# Altium PCB PCB1.PcbDoc (part 1 of 3)
Units mil, origin at the board's own origin, x right, y up, seen from the top; angles counter-clockwise.
Board outline 2780 x 2325 mil, 2 copper layers (Top Layer, Bottom Layer); 78 components, 66 nets, 284 pads, 83 vias.
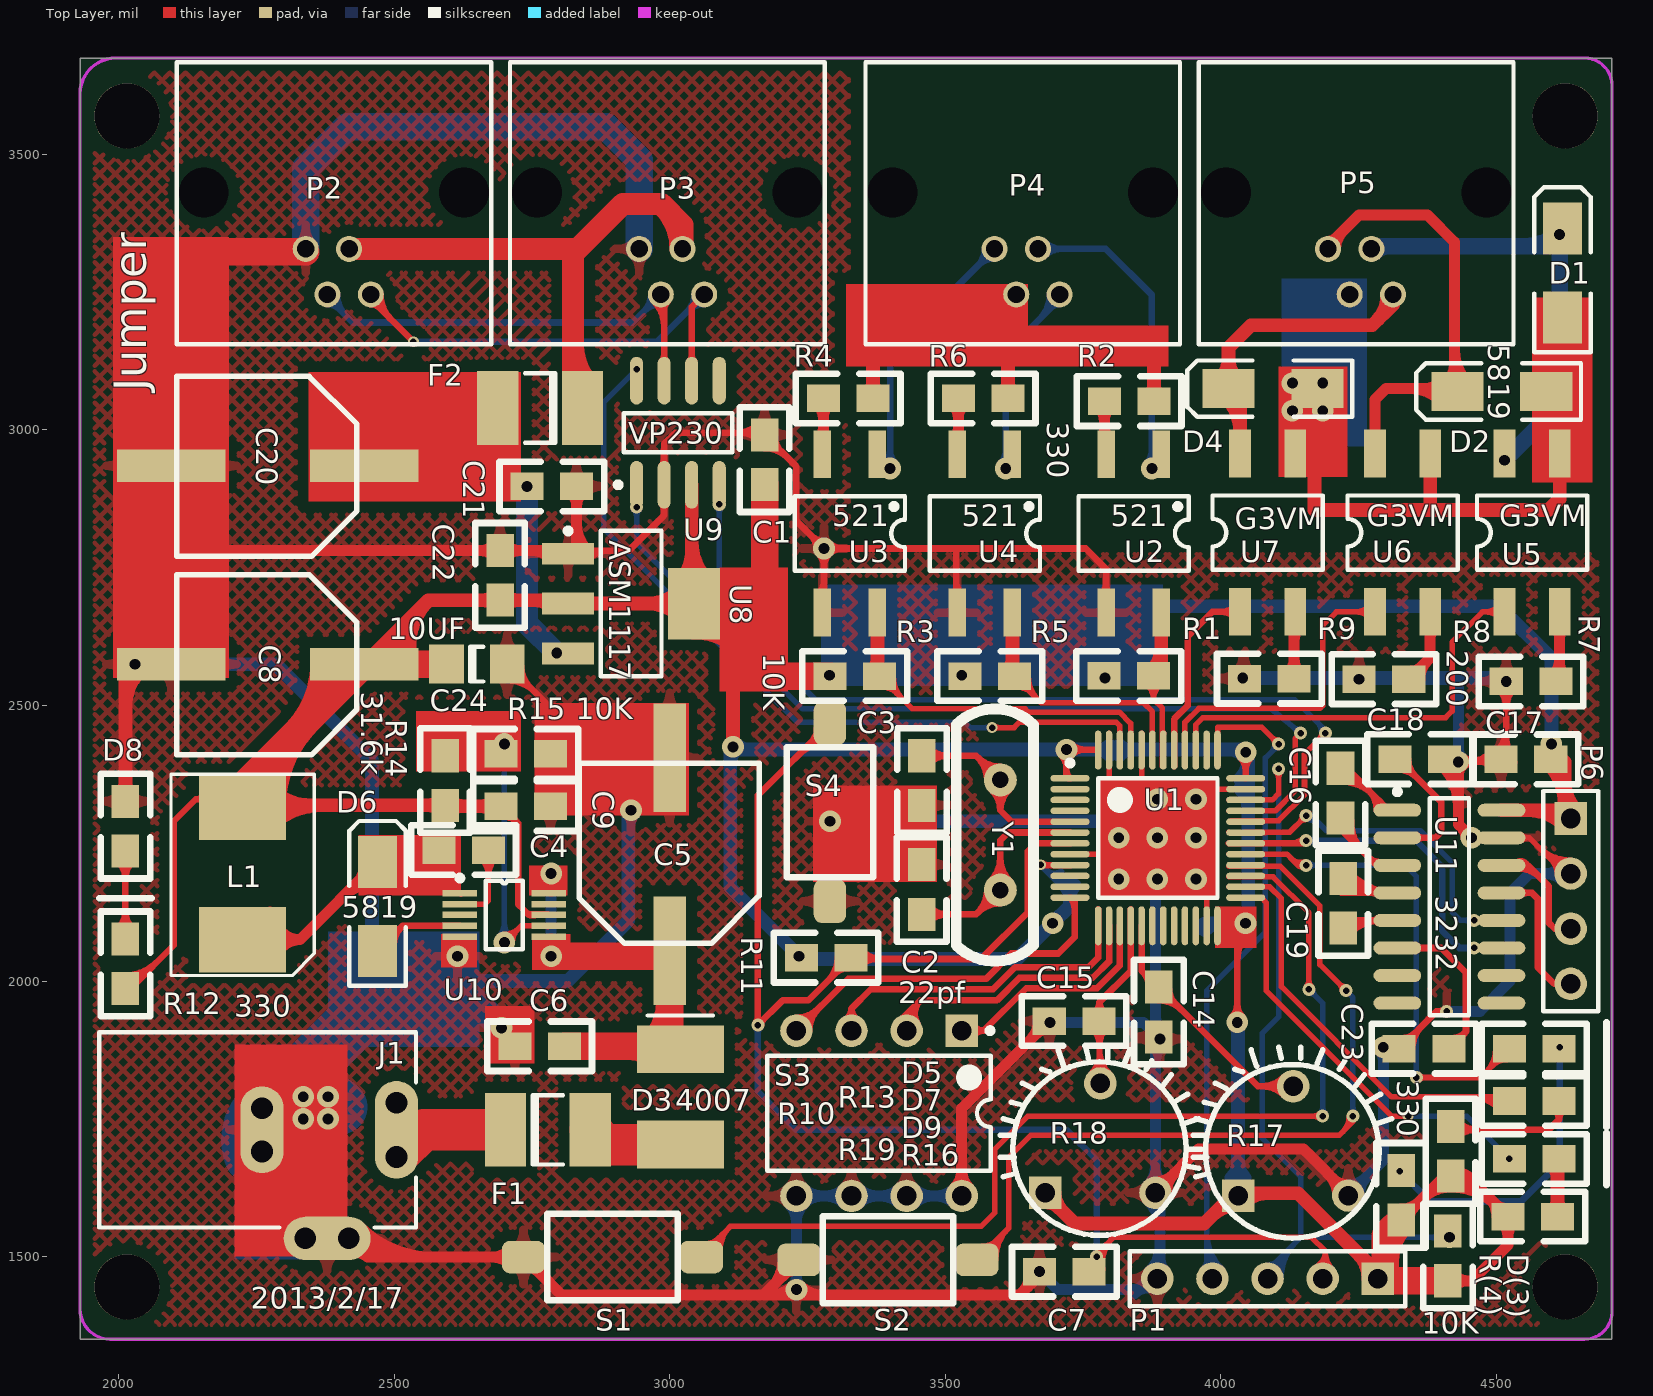
[diagram p0: Top Layer view]
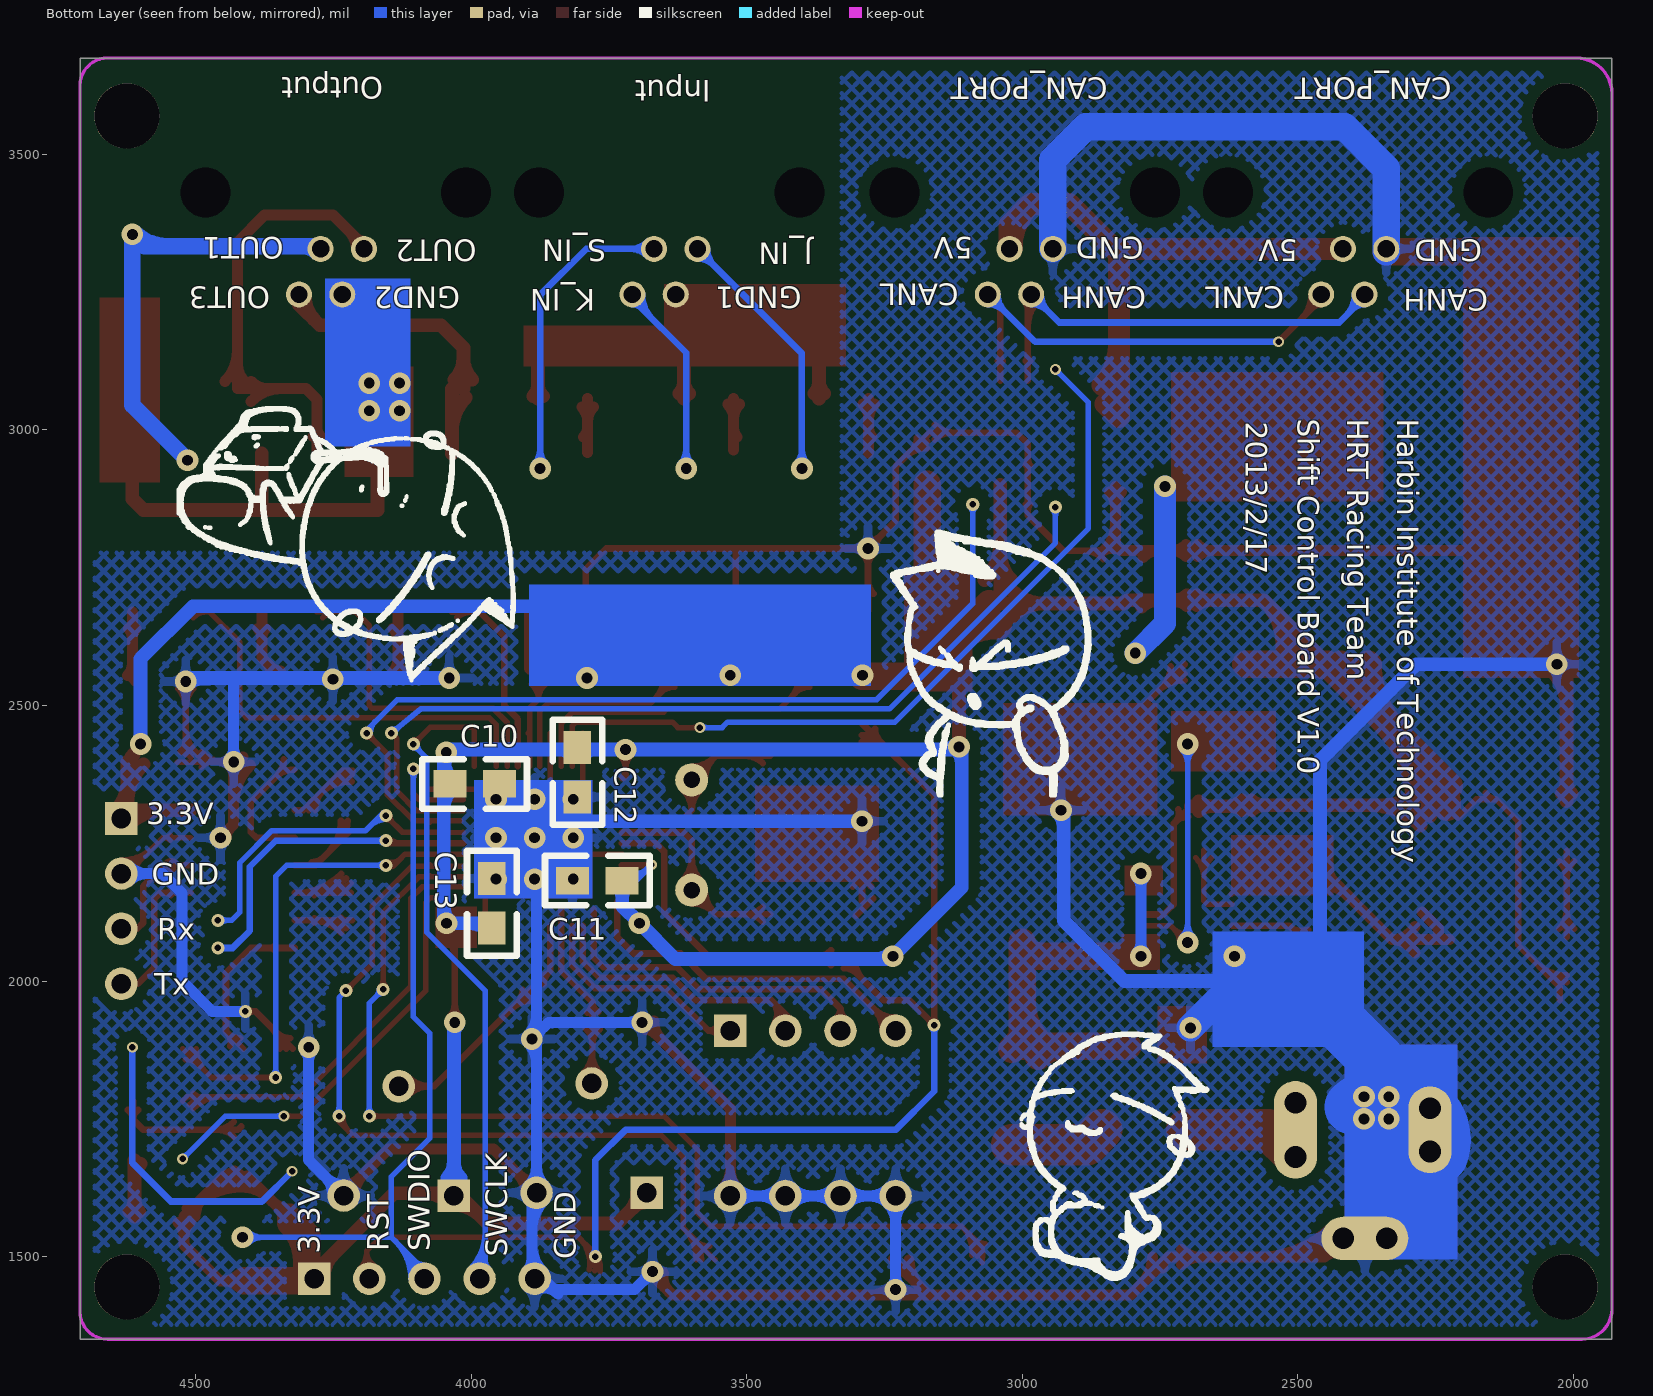
[diagram p1: Bottom Layer view, seen from below]
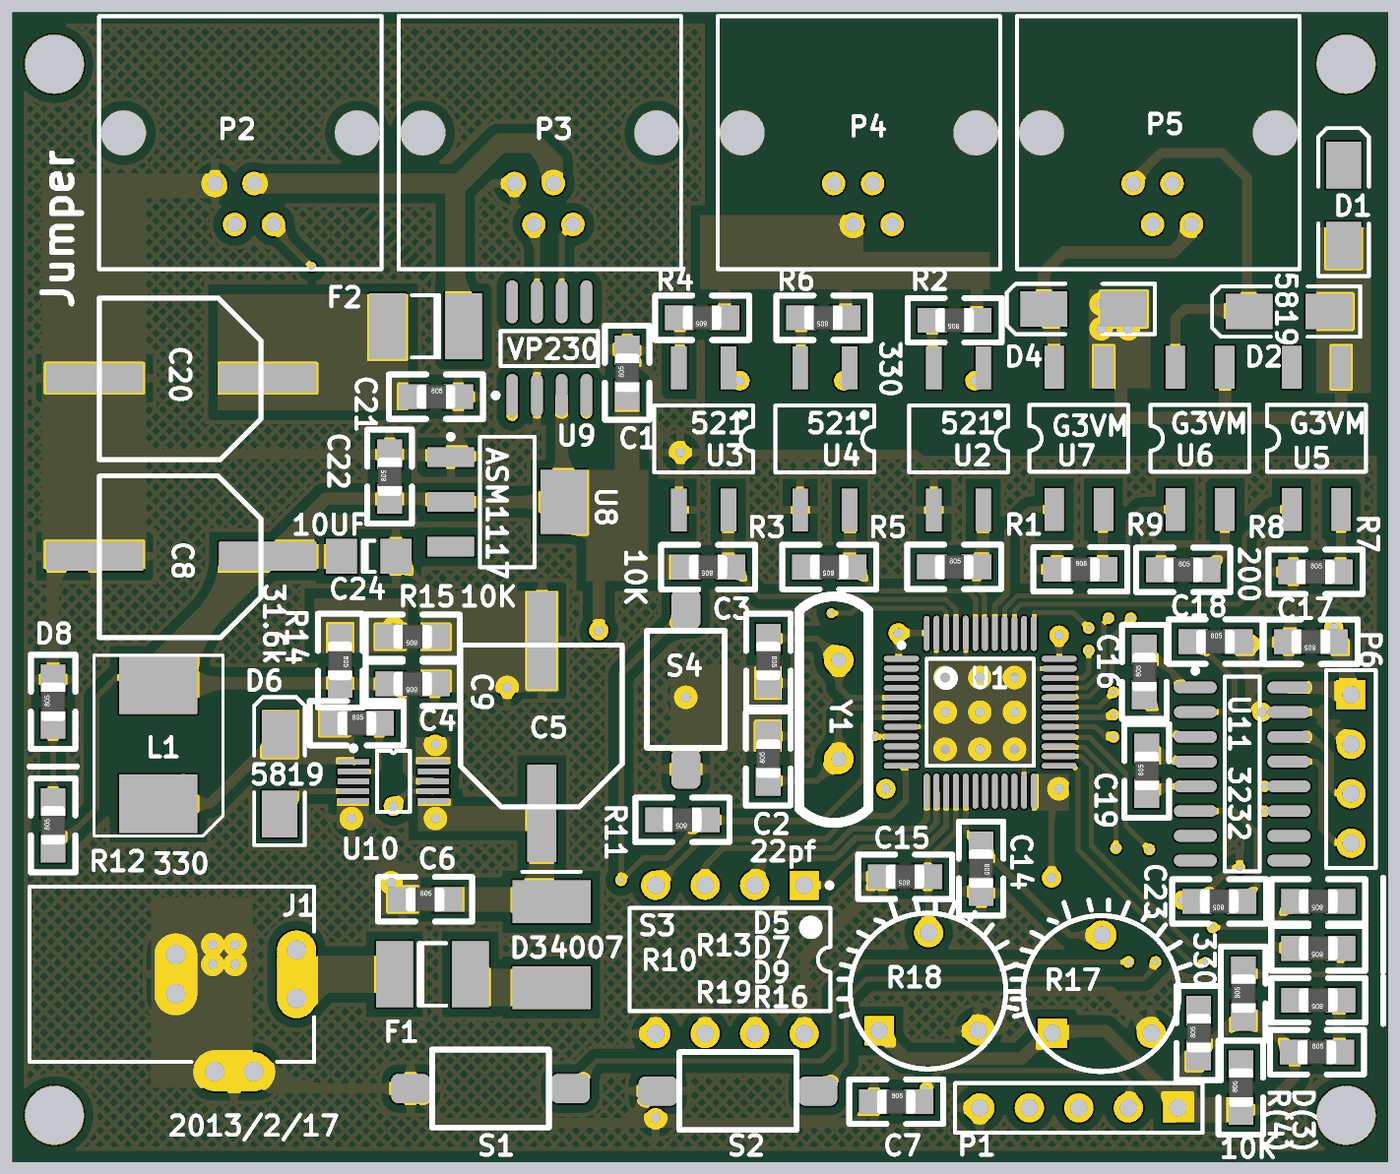
[diagram p4: 3D render of the assembled board from above, using the file's embedded part models]
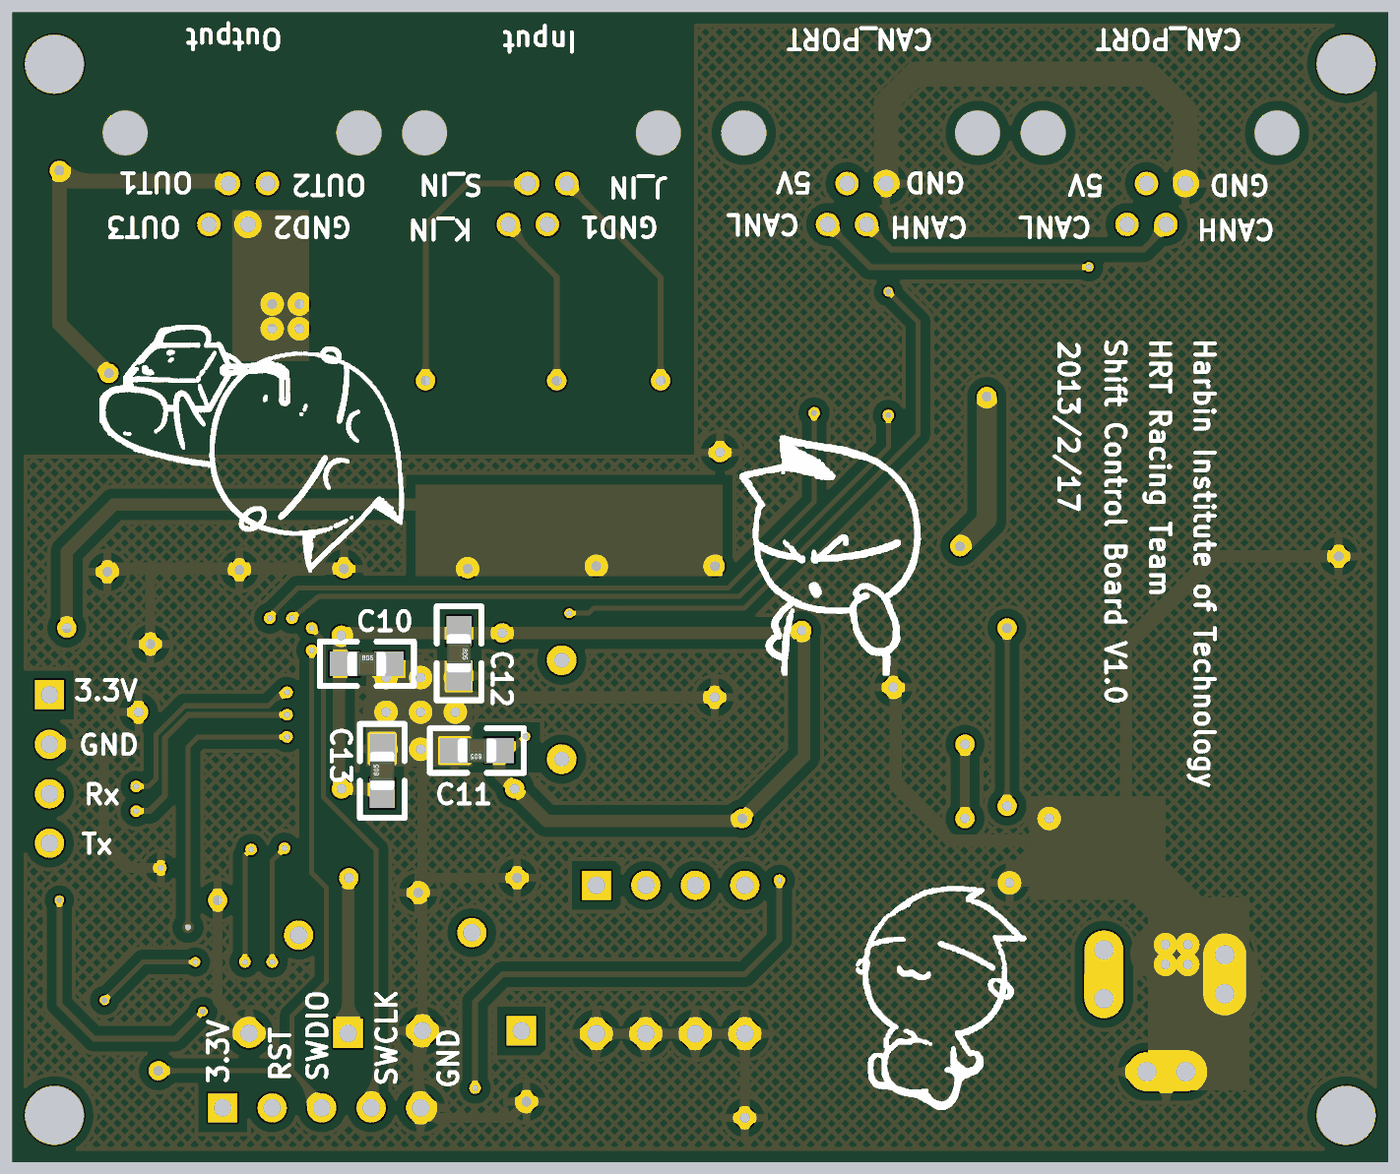
[diagram p5: 3D render of the assembled board from below, using the file's embedded part models]

## Layer stack, top to bottom
Top Layer: signal copper 1.4
Dielectric: dielectric 12.6, FR-4, Dk 4.8
Bottom Layer: signal copper 1.4

## Board outline
1930,3675 1930,1350 4710,1350 4710,3675

## Design rules (kind name [scope] priority, off if disabled: settings)
Clearance Clearance_1 [InPolygon] p1: gap=19.68
Clearance [All] p2: gap=7
PolygonConnect [All] p1: connectstyle=Relief reliefconductorwidth=15.75 reliefentries=4 polygonreliefangle="90 Angle"
RoutingVias [All] p1: holewidth=28 width=50 viastyle="Through Hole" minholewidth=28 minwidth=50 maxholewidth=28 maxwidth=50
SilkscreenOverComponentPads [All] p1: minsilkscreentomaskgap=10
SolderMaskExpansion [All] p1: expansion=4
Width [All] p1: maxlimit=120 minlimit=10 preferedwidth=10
27 further rules are at their usual default settings.

## Components (designator, comment, footprint, x,y, rotation, side; value= is the part's Value field where it differs from the comment)
C1 "Cap" 0805 3170,2945 r90 top
C2 "Cap" 0805 3460,2365 r270 top
C3 "Cap" 0805 3455,2165 r90 top
C4 "Cap" 0805 2625,2240 r0 top
C5 "Cap Pol1" CAP 2990,2245 r0 top
C6 "Cap" 0805 2763,1884 r0 top
C7 "Cap" 0805 3715,1475 r0 top
C8 "Cap Pol1" CAP 2256,2565 r90 top
C9 "Cap" 0805 2740,2315 r180 top
C10 "Cap" 0805 3965,2140 r90 bottom
C11 "Cap" 0805 3805,2380 r270 bottom
C12 "Cap" 0805 3995,2360 r180 bottom
C13 "Cap" 0805 3770,2180 r0 bottom
C14 "Cap" 0805 3890,1945 r270 top
C15 "Cap" 0805 3735,1925 r180 top
C16 "Cap" 0805 4215,2340 r90 top
C17 "Cap" 0805 4555,2400 r180 top
C18 "Cap" 0805 4360,2405 r0 top
C19 "Cap" 0805 4220,2140 r90 top
C20 "Cap Pol1" CAP 2256,2925 r90 top
C21 "Cap" 0805 2785,2900 r0 top
C22 "Cap" 0805 2690,2735 r90 top
C23 "Cap" 0805 4370,1875 r180 top
C24 "Cap" 1206 2650,2575 r0 top
D1 "Diode 1N5819" 1N5819 4620,3285 r90 top
D2 "Diode 1N5819" 1N5819 4510,3070 r180 top
D3 "Diode 1N4007" 1N4007 3019,1790 r270 top
D4 "Diode 1N5819" 1N5819 4095,3075 r180 top
D5 "LED2" 0805_polar 4570,1875 r180 top
D6 "Diode 1N5819" 1N5819 2470,2135 r90 top
D7 "LED2" 0805_polar 4570,1780 r180 top
D8 "LED2" 0805_polar 2010,2280 r90 top
D9 "LED2" 0805_polar 4570,1675 r180 top
F1 "Fuse 1" 1812 2779,1730 r0 top
F2 "Fuse 1" 1812 2765,3040 r180 top
J1 "PWR2.5" KLD-0202 1965,1730 r0 top
L1 "Inductor" SLF6025 2225,2160 r180 top
P1 "Header 1" HDR1X5 4285,1460 r180 top
P2 "CAN" RJ11 2630,3430 r180 top
P3 "CAN" RJ11 3235,3430 r180 top
P4 "RJ11" RJ11 3880,3430 r180 top
P5 "RJ11" RJ11 4485,3430 r180 top
P6 "Header 4" HDR1X4 4635,2295 r270 top
R1 "Res2" 0805 3832,2556 r0 top
R2 "Res2" 0805 3835,3050 r180 top
R3 "Res2" 0805 3337,2551 r180 top
R4 "Res2" 0805 3325,3055 r180 top
R5 "Res2" 0805 3582,2551 r180 top
R6 "Res2" 0805 3570,3055 r180 top
R7 "Res2" 0805 4562,2546 r0 top
R8 "Res2" 0805 4295,2550 r0 top
R9 "Res2" 0805 4087,2551 r0 top
R10 "Res2" 0805 4325,1610 r90 top
R11 "Res2" 0805 3285,2040 r180 top
R12 "Res2" 0805 2010,2030 r90 top
R13 "Res2" 0805 4415,1690 r90 top
R14 "Res2" 0805 2595,2365 r270 top
R15 "Res2" 0805 2740,2410 r180 top
R16 "Res2" 0805 4565,1575 r0 top
R17 "RPot SM" VR 4130,1695 r0 top
R18 "RPot SM" VR 3780,1700 r0 top
R19 "Res2" 0805 4410,1500 r90 top
S1 "SW-PB" key 2900,1505 r180 top
S2 "SW-PB" key 3400,1500 r180 top
S3 "SW DIP-4" DIP-8 3380,1760 r270 top
S4 "SW-PB" key 3285,2310 r270 top
U1 "STM32F103C8T6" LQFP48_N 3885.86,2259.69 r0 top
U2 "Optoisolator1" SOP4 3892,2956 r270 top
U3 "Optoisolator1" SOP4 3377,2956 r270 top
U4 "Optoisolator1" SOP4 3622,2956 r270 top
U5 "G3VM-21GR1" G3VM-21GR1 4515,2670 r90 top
U6 "G3VM-21GR1" G3VM-21GR1 4280,2670 r90 top
U7 "G3VM-21GR1" G3VM-21GR1 4035,2670 r90 top
U8 "LM1117IMP-3.3" MP04A_N 2930,2685 r0 top
U9 "vp230" SOP8_N 3015,2995 r90 top
U10 "LT3502" LT3502 2700,2120 r270 top
U11 "MAX3232CSE" NSO16_N 4415,2135 r0 top
Y1 "8MHz" XTAL 3600,2265 r270 top

## Footprints (in the part's own frame and the unit in brackets; to place one, negate y for a bottom-side part, rotate by r counter-clockwise, add the part's x,y. Pads: shape width x height; smd on the part's side, far side on the other; paste and mask are expansions set on the pad)
1N4007 [mm]
  rect 2.2x4 smd: 1(2.204,0.012) 2(-2.196,0.012)
  silkscreen extent -3.75,-1.49 -3.75,1.51
1N5819 [mm]
  rect 2.4x1.8 smd: 1(-2.05,0) 2(2.05,0)
  silkscreen extent -3.65,-1.3 3.95,1.3
0805 [mil]
  rect 60x50 smd: 1(-43.86,-2.31) 2(46.14,-2.31)
  silkscreen extent -94,-47 96,43, body extent -38,-27 41,22, height 31
0805_polar [mil]
  rect 60x50 smd: 1(-43.86,-2.31) 2(46.14,-2.31)
  silkscreen extent -130,-50 96,45, body extent -38,-27 41,22, height 31
1206 [mm]
  rect 1.6x1.8 smd: 1(-1.4,0) 2(1.4,0)
  silkscreen extent -0.3,-0.8 0.3,0.8
1812 [mm]
  rect 1.9x3.4 smd: 1(-1.95,0) 2(1.95,0)
  silkscreen extent -0.7,-1.6 0.7,1.6
CAP [mil]
  rect 59.06x196.85 smd: 1(10,-190) 2(10,160)
  silkscreen extent -154,-177 172,150
DIP-8 [mm]
  rect 1.5x1.5 hole 0.9: 1(-3.81,3.81)
  round 1.5 hole 0.9: 2(-3.81,1.27) 3(-3.81,-1.27) 4(-3.81,-3.81) 5(3.81,-3.81) 6(3.81,-1.27) 7(3.81,1.27) 8(3.81,3.81)
  silkscreen extent -3.93,-5.15 2.65,5.24, body extent -3.6,-5.15 3.6,5.15, height 5.08
G3VM-21GR1 [mm]
  rect 2.2x1 smd: 1(0,0) 2(0,-2.54) 3(7.3,-2.54) 4(7.3,0)
  silkscreen extent 1.93,-3.81 5.37,1.27
HDR1X4 [mm] "Connector; Header; 4 Position"
  rect 1.5x1.5 hole 0.9: 1(0,0)
  round 1.5 hole 0.9: 2(2.54,0) 3(5.08,0) 4(7.62,0)
  silkscreen extent -1.27,-1.27 8.89,1.27
HDR1X5 [mm] "Connector; Header; 5 Position"
  rect 1.5x1.5 hole 0.9: 1(0,0)
  round 1.5 hole 0.9: 2(2.54,0) 3(5.08,0) 4(7.62,0) 5(10.16,0)
  silkscreen extent -1.27,-1.27 11.43,1.27
key [mm]
  rrect50% 2x1.5 smd: 1(-4.003,0.149) 2(4.197,0.149)
  silkscreen extent -2.9,-1.85 3.1,2.15
KLD-0202 [mm] "DC Power Jack, 2.5mm, KLD Series, PCB Mount"
  oval 2x4.5 all layers, no hole: 1(13.7,0)
  round 1.5 hole 1: 1A(13.7,-1.25) 1B(13.7,1.25) 2A(7.5,-1) 2B(7.5,1) 3A(9.5,-5) 3B(11.5,-5)
  oval 2x4 all layers, no hole: 2(7.5,0)
  oval 4x2 all layers, no hole: 3(10.5,-5)
  silkscreen extent 0,-4.5 14.6,4.5
LQFP48_N [mm] "Thin QFP, 48-Leads, Body 7x7mm, Pitch 0.5mm, IPC Medium Density"
  oval 1.8x0.3 smd: 1(-4.05,2.75) 2(-4.05,2.25) 3(-4.05,1.75) 4(-4.05,1.25) 5(-4.05,0.75) 6(-4.05,0.25) 7(-4.05,-0.25) 8(-4.05,-0.75) 9(-4.05,-1.25) 10(-4.05,-1.75) 11(-4.05,-2.25) 12(-4.05,-2.75) 25(4.05,-2.75) 26(4.05,-2.25) 27(4.05,-1.75) 28(4.05,-1.25) 29(4.05,-0.75) 30(4.05,-0.25) 31(4.05,0.25) 32(4.05,0.75) 33(4.05,1.25) 34(4.05,1.75) 35(4.05,2.25) 36(4.05,2.75)
  oval 0.3x1.8 smd: 13(-2.75,-4.05) 14(-2.25,-4.05) 15(-1.75,-4.05) 16(-1.25,-4.05) 17(-0.75,-4.05) 18(-0.25,-4.05) 19(0.25,-4.05) 20(0.75,-4.05) 21(1.25,-4.05) 22(1.75,-4.05) 23(2.25,-4.05) 24(2.75,-4.05) 37(2.75,4.05) 38(2.25,4.05) 39(1.75,4.05) 40(1.25,4.05) 41(0.75,4.05) 42(0.25,4.05) 43(-0.25,4.05) 44(-0.75,4.05) 45(-1.25,4.05) 46(-1.75,4.05) 47(-2.25,4.05) 48(-2.75,4.05)
  silkscreen extent -4.17,-2.75 2.75,3.57, body extent -3.5,-3.5 3.5,3.5, height 1.6
LT3502 [mm]
  rect 0.3x1.6 smd: 1(-1,-2.05) 2(-0.5,-2.05) 3(0,-2.05) 4(0.5,-2.05) 5(1,-2.05) 6(1,2.05) 7(0.5,2.05) 8(0,2.05) 9(-0.5,2.05) 10(-1,2.05)
  silkscreen extent -1.82,-2.17 1.58,0.85
MP04A_N [mm] "SOT223, 4-Leads, Body 6.5x3.5mm, Pitch 2.3mm, Lead Span 7mm, IPC Medium Density"
  rect 2.4x1 smd: 1(-2.9,2.3) 2(-2.9,0) 3(-2.9,-2.3)
  rect 2.4x3.3 smd: 4(2.9,0)
  silkscreen extent -3.02,-3.35 1.4,3.47, body extent -1.85,-3.35 1.85,3.35, height 1.8
NSO16_N [mm] "SOIC, 16-Leads, Body 9.9x3.9mm, Pitch 1.27mm, IPC Medium Density"
  oval 2.2x0.6 smd: 1(-2.4,4.445) 2(-2.4,3.175) 3(-2.4,1.905) 4(-2.4,0.635) 5(-2.4,-0.635) 6(-2.4,-1.905) 7(-2.4,-3.175) 8(-2.4,-4.445) 9(2.4,-4.445) 10(2.4,-3.175) 11(2.4,-1.905) 12(2.4,-0.635) 13(2.4,0.635) 14(2.4,1.905) 15(2.4,3.175) 16(2.4,4.445)
  silkscreen extent -2.52,-5 0.9,5.42, body extent -2,-5 2,5, height 1.75
RJ11 [mm]
  round 0 hole 2.3: 0(0.076,-0.025) 0(12.076,-0.025)
  round 1.2 hole 0.8: 1(5.376,2.575) 2(7.376,2.575) 3(4.376,4.675) 4(6.376,4.675)
  silkscreen extent -1.17,-6.03 13.33,6.97
SLF6025 [mm]
  rect 4x3 smd: 1(0,2.159) 2(0,-3.937)
  silkscreen extent -3.31,-5.46 3.3,3.81
SOP4 [mm]
  rect 2.2x0.8 smd: 1(0,0) 2(0,-2.54) 3(7.3,-2.54) 4(7.3,0)
  silkscreen extent 1.93,-3.81 5.37,1.27
SOP8_N [mm]
  oval 2.2x0.6 smd: 1(-2.4,1.905) 2(-2.4,0.635) 3(-2.4,-0.635) 4(-2.4,-1.905) 5(2.4,-1.905) 6(2.4,-0.635) 7(2.4,0.635) 8(2.4,1.905)
  silkscreen extent -2.52,-2.5 0.9,2.88, body extent -1.95,-2.45 1.95,2.45, height 1.75
VR [mm]
  rect 1.5x1.5 hole 0.9: 1(-2.5,-2.14)
  round 1.5 hole 0.9: 2(2.58,-2.14) 3(0.04,2.9)
  silkscreen extent -4,-4.1 4,3.9
XTAL [mil]
  round 60 hole 30: 1(-100,0) 2(100,0)
  silkscreen extent -229,-80 229,60

## Part data
C1 C2 C3 C4 C6 C7 C9 C10 C11 C12 C13 C14 C15 C16 C17 C18 C19 C21 C22 C23 C24: "Capacitor"
C5 C8 C20: "Polarized Capacitor (Radial)"
D1 D2 D4 D6: library part "Diode 11DQ03", "Schottky Rectifier"
D3: "1 Amp General Purpose Rectifier"
D5 D7 D8 D9: "Typical RED, GREEN, YELLOW, AMBER GaAs LED"
F1 F2: "Fuse"
J1: "Low Voltage Power Supply Connector"
P1: library part "Header 5", "Header, 5-Pin"
P6: "Header, 4-Pin"
R1 R2 R3 R4 R5 R6 R7 R8 R9 R10 R11 R12 R13 R14 R15 R16 R19: "Resistor"
R17 R18: "Square Trimming Potentiometer"
S1 S2 S4: "Switch"
S3: "DIP Switch, 4 Position, SPST"
U1: "STM32 ARM-based 32-bit MCU with 64 Kbytes Flash, 48-pin LQFP, Industrial Temperature"
U2 U3 U4: "4-Pin Phototransistor Optocoupler"
U8: "800mA Low-Dropout Linear Regulator"
U11: "3.0V TO 5.5V, Low-Power, up to 1Mbps, True RS-232 Transceiver Using Four 0.1礔 External Capacitor"
Y1: library part XTAL, "Crystal Oscillator"

## Free pads (board coordinates)
  round 118.11 hole 118.11: 0(2015,3570) 1(4625,3570) 2(4625,1445) 3(2015,1445)

## Via types
v1: diameter 39.37, hole 19.68, Top Layer to Bottom Layer, 56 vias
v2: diameter 23.62, hole 11.81, Top Layer to Bottom Layer, 18 vias
v3: diameter 19.68, hole 11.81, Top Layer to Bottom Layer, 8 vias
v4: diameter 23.62, hole 11.81, Top Layer to Bottom Layer, tented bottom, 1 vias

## Nets (pads, with @x,y where several pads share a name; then routed paths per layer and width w, separated by ;. In a path a pad name is that pad's centre, name@x,y a point inside that pad or via, vN(x,y) a via of type N, cw(c..) or ccw(c..) an arc to the next point about the centre after c; other vN are vias at no path point)
3.3V: C1.1 C8.1 C9.2 C10.1 C11.1 C12.1 C13.1 C17.1 C22.1 C24.1 L1.2 P1.1 P6.1 R1.1 R3.2 R5.2 R10.1 R11.2 R12.1 R13.1 R14.2 R16.1 R17.1 R18.1 R19.1 U1.1 U1.9 U1.24 U1.36 U1.48 U8.2 U8.4 U9.3 U10.8 U11.16 | length 21928.2
  Top Layer w12: R12.1@2025,1965 2025,1990 2100,2065 2100,2290 2140,2330 ; L1.2@2210,2296 2176,2330 2140,2330 ; C9.2@2693.86,2317.31 2725,2286.17 2725,2139.61 2736.21,2128.39 ; 2736.21,2128.79 2736.21,2128.39 ; U10.8@2780.71,2120 2779.93,2120.78 2743.83,2120.78 2736.21,2128.39 ; v3(3673,2211) 3673.53,2210.47 U1.9@3726.41,2210.47 ; v3@3675.72,2213.72 ccw(c3683.55,2221.55) 3683.55,2210.47 ; U1.1@3726.41,2367.95 3720,2374.36 ; U1.48@3776.73,2420 v1(3720,2420) 3720,2374.36 ; U1.24@3994.13,2100.24 4040.24,2100.24 4030,2090 v1(4030,1925) ; U1.36@4045.31,2367.95 v1(4045.31,2415.31) ; R12.1@2012.31,1998.14 ccw(c2012.31,2048.43) 2047.87,2012.87 ; R12.1@2012.31,1998.14 ccw(c2012.31,2048.43) 2047.87,2012.87 ; R12.1@2012.31,1998.14 ccw(c2012.31,2048.43) 2047.87,2012.87 ; R12.1@2012.31,2010.14 ccw(c2012.31,2089.4) 2068.36,2033.36 ; R12.1@2012.31,2010.14 ccw(c2012.31,2089.4) 2068.36,2033.36 ; R12.1@2012.31,2010.14 ccw(c2012.31,2089.4) 2068.36,2033.36 ; 2140,2330 ccw(c2140,2352.02) L1.2@2159.16,2341.16 ; 2140,2330 ccw(c2140,2352.02) L1.2@2159.16,2341.16 ; 2140,2330 ccw(c2140,2352.02) L1.2@2159.16,2341.16 ; C9.2@2698.99,2298.31 cw(c2699.22,2265.4) 2722.5,2288.67 ; C9.2@2698.99,2298.31 cw(c2699.22,2265.4) 2722.5,2288.67 ; C9.2@2698.99,2298.31 cw(c2699.22,2265.4) 2722.5,2288.67 ; C9.2@2716.96,2311.53 ccw(c2738.47,2304.65) 2722.5,2288.67 ; C9.2@2716.96,2311.53 ccw(c2738.47,2304.65) 2722.5,2288.67 ; C9.2@2716.96,2311.53 ccw(c2738.47,2304.65) 2722.5,2288.67 ; 2741.47,2123.14 ccw(c2750.92,2132.59) U10.8@2755.15,2119.91 ; 2741.47,2123.14 ccw(c2750.92,2132.59) U10.8@2755.15,2119.91 ; 2741.47,2123.14 ccw(c2750.92,2132.59) U10.8@2755.15,2119.91 ; v1@3710.32,2410.32 cw(c3686.96,2386.96) 3720,2386.96 ; v1@3710.32,2410.32 cw(c3686.96,2386.96) 3720,2386.96 ; v1@3710.32,2410.32 cw(c3686.96,2386.96) 3720,2386.96 ; 3720,2374.36 ccw(c3726.5,2374.36) U1.1@3726.41,2367.86 ; 3720,2374.36 ccw(c3726.5,2374.36) U1.1@3726.41,2367.86 ; 3720,2374.36 ccw(c3726.5,2374.36) U1.1@3726.41,2367.86 ; 3720,2383.2 ccw(c3741.65,2383.2) U1.1@3726.34,2367.89 ; 3720,2383.2 ccw(c3741.65,2383.2) U1.1@3726.34,2367.89 ; 3720,2383.2 ccw(c3741.65,2383.2) U1.1@3726.34,2367.89 ; 3720,2386.96 cw(c3753.04,2386.96) v1@3729.68,2410.32 ; 3720,2386.96 cw(c3753.04,2386.96) v1@3729.68,2410.32 ; 3720,2386.96 cw(c3753.04,2386.96) v1@3729.68,2410.32 ; v1@3729.68,2410.32 cw(c3753.04,2386.96) 3753.04,2420 ; v1@3729.68,2410.32 cw(c3753.04,2386.96) 3753.04,2420 ; v1@3729.68,2410.32 cw(c3753.04,2386.96) 3753.04,2420 ; v1@3729.68,2429.68 ccw(c3753.04,2453.04) 3753.04,2420 ; v1@3729.68,2429.68 ccw(c3753.04,2453.04) 3753.04,2420 ; v1@3729.68,2429.68 ccw(c3753.04,2453.04) 3753.04,2420 ; 4000.47,2100.24 ccw(c4000.47,2149.53) v1@4035.32,2114.68 ; 4000.47,2100.24 ccw(c4000.47,2149.53) v1@4035.32,2114.68 ; 4000.47,2100.24 ccw(c4000.47,2149.53) v1@4035.32,2114.68 ; v1@4020.32,1934.68 ccw(c3996.96,1958.04) 4030,1958.04 ; v1@4020.32,1934.68 ccw(c3996.96,1958.04) 4030,1958.04 ; v1@4020.32,1934.68 ccw(c3996.96,1958.04) 4030,1958.04 ; 4023.46,2100.24 cw(c4023.46,2083.46) v1@4035.32,2095.32 ; 4023.46,2100.24 cw(c4023.46,2083.46) v1@4035.32,2095.32 ; 4023.46,2100.24 cw(c4023.46,2083.46) v1@4035.32,2095.32 ; 4030,1958.04 ccw(c4063.04,1958.04) v1@4039.68,1934.68 ; 4030,1958.04 ccw(c4063.04,1958.04) v1@4039.68,1934.68 ; 4030,1958.04 ccw(c4063.04,1958.04) v1@4039.68,1934.68 ; 4030,2035.75 cw(c4114.25,2035.75) v1@4054.68,2095.32 ; 4030,2035.75 cw(c4114.25,2035.75) v1@4054.68,2095.32 ; 4030,2035.75 cw(c4114.25,2035.75) v1@4054.68,2095.32 ; 4030,2064.72 cw(c4085.28,2064.72) v1@4046.19,2103.81 ; 4030,2064.72 cw(c4085.28,2064.72) v1@4046.19,2103.81 ; 4030,2064.72 cw(c4085.28,2064.72) v1@4046.19,2103.81 ; v1@4035.63,2405.63 cw(c4012.27,2382.27) 4045.31,2382.27 ; v1@4035.63,2405.63 cw(c4012.27,2382.27) 4045.31,2382.27 ; v1@4035.63,2405.63 cw(c4012.27,2382.27) 4045.31,2382.27 ; 4045.31,2382.27 cw(c4078.35,2382.27) v1@4054.98,2405.63 ; 4045.31,2382.27 cw(c4078.35,2382.27) v1@4054.98,2405.63 ; 4045.31,2382.27 cw(c4078.35,2382.27) v1@4054.98,2405.63
  Top Layer w20: R10.1@4327.31,1566.14 R13.1@4407.31,1646.14 ; R19.1@4412.31,1456.14 4456.14,1456.14 4521.14,1521.14 R16.1@4521.14,1572.69 4447.69,1646.14 ; R10.1@4327.31,1586.14 ccw(c4327.31,1634.43) 4361.45,1600.28 ; R10.1@4327.31,1586.14 ccw(c4327.31,1634.43) 4361.45,1600.28 ; R10.1@4327.31,1586.14 ccw(c4327.31,1634.43) 4361.45,1600.28 ; R10.1@4342.31,1571.14 cw(c4366.45,1571.14) R10.1@4349.38,1588.21 ; R10.1@4342.31,1571.14 cw(c4366.45,1571.14) R10.1@4349.38,1588.21 ; R10.1@4342.31,1571.14 cw(c4366.45,1571.14) R10.1@4349.38,1588.21 ; 4366.1,1604.93 cw(c4417.31,1553.72) R13.1@4417.31,1626.14 ; 4366.1,1604.93 cw(c4417.31,1553.72) R13.1@4417.31,1626.14 ; 4366.1,1604.93 cw(c4417.31,1553.72) R13.1@4417.31,1626.14 ; R13.1@4414.04,1644.92 cw(c4431.43,1624.87) 4450.19,1643.64 ; R13.1@4414.04,1644.92 cw(c4431.43,1624.87) 4450.19,1643.64 ; R13.1@4414.04,1644.92 cw(c4431.43,1624.87) 4450.19,1643.64 ; R13.1@4417.31,1626.14 cw(c4417.31,1504.53) R16.1@4503.31,1590.52 ; R13.1@4417.31,1626.14 cw(c4417.31,1504.53) R16.1@4503.31,1590.52 ; R13.1@4417.31,1626.14 cw(c4417.31,1504.53) R16.1@4503.31,1590.52 ; R13.1@4417.31,1646.14 cw(c4417.31,1572.81) 4469.17,1624.66 ; R13.1@4417.31,1646.14 cw(c4417.31,1572.81) 4469.17,1624.66 ; R13.1@4417.31,1646.14 cw(c4417.31,1572.81) 4469.17,1624.66 ; R13.1@4417.31,1646.14 4447.69,1646.14 ; R19.1@4422.92,1445.54 cw(c4448.53,1419.93) 4448.53,1456.14 ; R19.1@4422.92,1445.54 cw(c4448.53,1419.93) 4448.53,1456.14 ; R19.1@4422.92,1445.54 cw(c4448.53,1419.93) 4448.53,1456.14 ; R19.1@4422.92,1466.75 ccw(c4448.53,1492.36) 4448.53,1456.14 ; R19.1@4422.92,1466.75 ccw(c4448.53,1492.36) 4448.53,1456.14 ; R19.1@4422.92,1466.75 ccw(c4448.53,1492.36) 4448.53,1456.14 ; R13.1@4427.14,1629.81 cw(c4445.53,1608.61) 4465.37,1628.46 ; R13.1@4427.14,1629.81 cw(c4445.53,1608.61) 4465.37,1628.46 ; R13.1@4427.14,1629.81 cw(c4445.53,1608.61) 4465.37,1628.46 ; R13.1@4429.22,1637.02 cw(c4447.69,1622.89) 4447.69,1646.14 ; R13.1@4429.22,1637.02 cw(c4447.69,1622.89) 4447.69,1646.14 ; R13.1@4429.22,1637.02 cw(c4447.69,1622.89) 4447.69,1646.14 ; R13.1@4429.22,1655.26 ccw(c4447.69,1669.39) 4447.69,1646.14 ; R13.1@4429.22,1655.26 ccw(c4447.69,1669.39) 4447.69,1646.14 ; R13.1@4429.22,1655.26 ccw(c4447.69,1669.39) 4447.69,1646.14 ; 4487,1606.83 cw(c4452.86,1572.69) R16.1@4501.14,1572.69 ; 4487,1606.83 cw(c4452.86,1572.69) R16.1@4501.14,1572.69 ; 4487,1606.83 cw(c4452.86,1572.69) R16.1@4501.14,1572.69 ; R16.1@4499.07,1594.76 ccw(c4516.14,1611.83) R16.1@4516.14,1587.69 ; R16.1@4499.07,1594.76 ccw(c4516.14,1611.83) R16.1@4516.14,1587.69 ; R16.1@4499.07,1594.76 ccw(c4516.14,1611.83) R16.1@4516.14,1587.69 ; R16.1@4510.54,1562.08 cw(c4484.93,1536.47) 4521.14,1536.47 ; R16.1@4510.54,1562.08 cw(c4484.93,1536.47) 4521.14,1536.47 ; R16.1@4510.54,1562.08 cw(c4484.93,1536.47) 4521.14,1536.47 ; 4521.14,1536.47 cw(c4557.35,1536.47) R16.1@4531.75,1562.08 ; 4521.14,1536.47 cw(c4557.35,1536.47) R16.1@4531.75,1562.08 ; 4521.14,1536.47 cw(c4557.35,1536.47) R16.1@4531.75,1562.08
  Top Layer w25: L1.2@2275,2318.86 R14.2@2587.69,2318.86 ; C8.1@2446,2575 2562.14,2691.14 ; R14.2@2589.23,2317.31 C9.2@2693.86,2317.31 ; U9.3@3040,2900.51 3040,2689.17 U8.4@3044.17,2685 ; U8.4@3060,2685 U8.4@3044.17,2685 ; v1(3115,2425) 3115,2570 3120,2575 3170,2575 ; R18.1@3681.57,1630.75 3681.57,1613.43 3735,1560 3970,1560 4025,1615 4140,1615 P1.1@4290,1465 ; U11.16@4509.49,2310 4623.86,2310 C17.1@4623.86,2397.31 ; L1.2@2259.93,2299.76 cw(c2306.04,2253.65) 2306.04,2318.86 ; L1.2@2259.93,2299.76 cw(c2306.04,2253.65) 2306.04,2318.86 ; L1.2@2259.93,2299.76 cw(c2306.04,2253.65) 2306.04,2318.86 ; L1.2@2277.6,2282.08 cw(c2366.39,2193.29) 2366.39,2318.86 ; L1.2@2277.6,2282.08 cw(c2366.39,2193.29) 2366.39,2318.86 ; L1.2@2277.6,2282.08 cw(c2366.39,2193.29) 2366.39,2318.86 ; L1.2@2277.6,2347.92 ccw(c2347.76,2418.08) 2347.76,2318.86 ; L1.2@2277.6,2347.92 ccw(c2347.76,2418.08) 2347.76,2318.86 ; L1.2@2277.6,2347.92 ccw(c2347.76,2418.08) 2347.76,2318.86 ; C8.1@2434.49,2554.52 cw(c2447.05,2557.72) C8.1@2437.89,2566.89 ; C8.1@2434.49,2554.52 cw(c2447.05,2557.72) C8.1@2437.89,2566.89 ; C8.1@2434.49,2554.52 cw(c2447.05,2557.72) C8.1@2437.89,2566.89 ; C8.1@2458.72,2560.69 cw(c2496.57,2570.33) C8.1@2468.95,2597.95 ; C8.1@2458.72,2560.69 cw(c2496.57,2570.33) C8.1@2468.95,2597.95 ; C8.1@2458.72,2560.69 cw(c2496.57,2570.33) C8.1@2468.95,2597.95 ; C8.1@2482.95,2566.86 cw(c2546.08,2582.94) 2500.01,2629.01 ; C8.1@2482.95,2566.86 cw(c2546.08,2582.94) 2500.01,2629.01 ; C8.1@2482.95,2566.86 cw(c2546.08,2582.94) 2500.01,2629.01 ; C8.1@2507.17,2573.03 cw(c2595.6,2595.55) 2531.08,2660.08 ; C8.1@2507.17,2573.03 cw(c2595.6,2595.55) 2531.08,2660.08 ; C8.1@2507.17,2573.03 cw(c2595.6,2595.55) 2531.08,2660.08 ; C8.1@2531.4,2579.2 cw(c2645.11,2608.16) 2562.14,2691.14 ; C8.1@2531.4,2579.2 cw(c2645.11,2608.16) 2562.14,2691.14 ; C8.1@2531.4,2579.2 cw(c2645.11,2608.16) 2562.14,2691.14 ; 2562.14,2691.14 C22.1@2692.31,2691.14 2809.68,2691.14 U8.2@2815.83,2685 U8.4@3044.17,2685 ; 2562.51,2318.86 cw(c2562.51,2288.68) R14.2@2583.85,2310.02 ; 2562.51,2318.86 ccw(c2562.51,2349.04) R14.2@2583.85,2327.7 ; 2562.51,2318.86 ccw(c2562.51,2349.04) R14.2@2583.85,2327.7 ; 2562.51,2318.86 cw(c2562.51,2288.68) R14.2@2583.85,2310.02 ; 2562.51,2318.86 ccw(c2562.51,2349.04) R14.2@2583.85,2327.7 ; 2562.51,2318.86 cw(c2562.51,2288.68) R14.2@2583.85,2310.02 ; R14.2@2601.53,2310.02 cw(c2619.13,2292.41) 2619.13,2317.31 ; R14.2@2601.53,2310.02 cw(c2619.13,2292.41) 2619.13,2317.31 ; R14.2@2601.53,2310.02 cw(c2619.13,2292.41) 2619.13,2317.31 ; R14.2@2601.53,2327.7 ccw(c2626.6,2352.77) 2626.6,2317.31 ; R14.2@2601.53,2327.7 ccw(c2626.6,2352.77) 2626.6,2317.31 ; R14.2@2601.53,2327.7 ccw(c2626.6,2352.77) 2626.6,2317.31 ; 2658.68,2317.31 cw(c2658.68,2287.14) C9.2@2680.02,2308.47 ; 2658.68,2317.31 ccw(c2658.68,2347.49) C9.2@2680.02,2326.15 ; 2658.68,2317.31 ccw(c2658.68,2347.49) C9.2@2680.02,2326.15 ; 2658.68,2317.31 cw(c2658.68,2287.14) C9.2@2680.02,2308.47 ; 2658.68,2317.31 ccw(c2658.68,2347.49) C9.2@2680.02,2326.15 ; 2658.68,2317.31 cw(c2658.68,2287.14) C9.2@2680.02,2308.47 ; 2662.14,2691.14 cw(c2662.14,2660.96) C22.1@2683.47,2682.3 ; 2662.14,2691.14 ccw(c2662.14,2721.32) C22.1@2683.47,2699.98 ; 2662.14,2691.14 ccw(c2662.14,2721.32) C22.1@2683.47,2699.98 ; 2662.14,2691.14 cw(c2662.14,2660.96) C22.1@2683.47,2682.3 ; 2662.14,2691.14 ccw(c2662.14,2721.32) C22.1@2683.47,2699.98 ; 2662.14,2691.14 cw(c2662.14,2660.96) C22.1@2683.47,2682.3 ; C22.1@2701.15,2682.3 cw(c2722.49,2660.96) 2722.49,2691.14 ; C22.1@2701.15,2682.3 cw(c2722.49,2660.96) 2722.49,2691.14 ; C22.1@2701.15,2682.3 cw(c2722.49,2660.96) 2722.49,2691.14 ; C22.1@2701.15,2699.98 ccw(c2722.49,2721.32) 2722.49,2691.14 ; C22.1@2701.15,2699.98 ccw(c2722.49,2721.32) 2722.49,2691.14 ; C22.1@2701.15,2699.98 ccw(c2722.49,2721.32) 2722.49,2691.14 ; 2756.09,2691.14 cw(c2756.09,2652.83) U8.2@2783.19,2679.92 ; 2756.09,2691.14 cw(c2756.09,2652.83) U8.2@2783.19,2679.92 ; 2756.09,2691.14 cw(c2756.09,2652.83) U8.2@2783.19,2679.92 ; 2960.29,2685 cw(c2960.29,2601.12) U8.4@3019.61,2660.43 ; 2960.29,2685 ccw(c2960.29,2768.88) U8.4@3019.61,2709.57 ; 2960.29,2685 ccw(c2960.29,2768.88) U8.4@3019.61,2709.57 ; 2960.29,2685 cw(c2960.29,2601.12) U8.4@3019.61,2660.43 ; 2960.29,2685 ccw(c2960.29,2768.88) U8.4@3019.61,2709.57 ; 2960.29,2685 cw(c2960.29,2601.12) U8.4@3019.61,2660.43 ; U8.4@3019.61,2727.28 ccw(c2970.37,2776.52) 3040,2776.52 ; U8.4@3019.61,2727.28 ccw(c2970.37,2776.52) 3040,2776.52 ; U8.4@3019.61,2727.28 ccw(c2970.37,2776.52) 3040,2776.52 ; 3040,2796.67 ccw(c3138.13,2796.67) U8.4@3068.74,2727.28 ; 3040,2796.67 ccw(c3138.13,2796.67) U8.4@3068.74,2727.28 ; 3040,2796.67 ccw(c3138.13,2796.67) U8.4@3068.74,2727.28 ; 4248.86,1506.14 cw(c4202.72,1460) P1.1@4267.97,1460 ; 4248.86,1506.14 cw(c4202.72,1460) P1.1@4267.97,1460 ; 4248.86,1506.14 cw(c4202.72,1460) P1.1@4267.97,1460 ; 4557.68,2310 cw(c4557.68,2217.68) P6.1@4622.96,2282.96 ; 4557.68,2310 cw(c4557.68,2217.68) P6.1@4622.96,2282.96 ; 4557.68,2310 cw(c4557.68,2217.68) P6.1@4622.96,2282.96 ; C17.1@4595.02,2393.47 cw(c4525.4,2323.85) P6.1@4623.86,2323.85 ; C17.1@4595.02,2393.47 cw(c4525.4,2323.85) P6.1@4623.86,2323.85 ; C17.1@4595.02,2393.47 cw(c4525.4,2323.85) P6.1@4623.86,2323.85 ; C17.1@4612.7,2411.15 cw(c4585.75,2384.21) C17.1@4623.86,2384.21 ; C17.1@4612.7,2411.15 cw(c4585.75,2384.21) C17.1@4623.86,2384.21 ; C17.1@4612.7,2411.15 cw(c4585.75,2384.21) C17.1@4623.86,2384.21 ; 4623.86,2363.01 ccw(c4703.01,2363.01) P6.1@4647.04,2307.04 ; 4623.86,2363.01 ccw(c4703.01,2363.01) P6.1@4647.04,2307.04 ; 4623.86,2363.01 ccw(c4703.01,2363.01) P6.1@4647.04,2307.04 ; R18.1@3681.57,1598.72 cw(c3681.57,1563.22) 3706.68,1588.32 ccw(c3681.57,1563.22) R18.1@3681.57,1598.72 ; R18.1@3698.6,1615.75 ccw(c3745.32,1615.75) 3712.29,1582.71 cw(c3745.32,1615.75) R18.1@3698.6,1615.75 ; 3984.02,1574.02 cw(c4031.57,1526.47) 4031.57,1593.72 ccw(c4031.57,1526.47) 3984.02,1574.02 ; R17.1@4043.62,1598.71 cw(c4082.95,1559.37) 4082.95,1615 ccw(c4082.95,1559.37) R17.1@4043.62,1598.71 ; R17.1@4043.62,1622.79 ccw(c4062.42,1641.59) 4062.42,1615 cw(c4062.42,1641.59) R17.1@4043.62,1622.79
  Top Layer w50: L1.2@2225,2354 C8.1@2446,2575 C24.1@2594.88,2575 ; U8.4@3060,2685 3170,2575 ; C1.1@3172.31,2901.14 3172.31,2577.31 3170,2575 ; R3.2@3290.86,2553.31 3191.69,2553.31 3170,2575 ; P1.1@4290,1465 P1.1@4298.86,1456.14 ; R10.1@4327.31,1566.14 4298.86,1537.69 P1.1@4298.86,1456.14 ; R19.1@4412.31,1456.14 P1.1@4298.86,1456.14 ; L1.2@2228.74,2315 cw(c2331.92,2315) 2258.96,2387.96 ; L1.2@2228.74,2315 cw(c2331.92,2315) 2258.96,2387.96 ; L1.2@2228.74,2315 cw(c2331.92,2315) 2258.96,2387.96 ; L1.2@2278.74,2315 cw(c2502.63,2315) 2344.32,2473.32 ; L1.2@2278.74,2315 cw(c2502.63,2315) 2344.32,2473.32 ; L1.2@2278.74,2315 cw(c2502.63,2315) 2344.32,2473.32 ; 2320.66,2449.66 ccw(c2195.31,2575) C8.1@2372.57,2575 ; 2320.66,2449.66 ccw(c2195.31,2575) C8.1@2372.57,2575 ; 2320.66,2449.66 ccw(c2195.31,2575) C8.1@2372.57,2575 ; 2406.01,2535.01 ccw(c2366.02,2575) C8.1@2422.57,2575 ; 2406.01,2535.01 ccw(c2366.02,2575) C8.1@2422.57,2575 ; 2406.01,2535.01 ccw(c2366.02,2575) C8.1@2422.57,2575 ; U8.4@3044.17,2645.04 cw(c3044.17,2510.36) 3139.41,2605.59 ; U8.4@3044.17,2645.04 cw(c3044.17,2510.36) 3139.41,2605.59 ; U8.4@3044.17,2645.04 cw(c3044.17,2510.36) 3139.41,2605.59 ; P1.1@4281.8,1463.2 ccw(c4240.61,1504.39) 4298.86,1504.39 ; P1.1@4281.8,1463.2 ccw(c4240.61,1504.39) 4298.86,1504.39 ; P1.1@4281.8,1463.2 ccw(c4240.61,1504.39) 4298.86,1504.39 ; 4298.86,1492.45 cw(c4396.01,1492.45) R10.1@4327.31,1561.14 ; 4298.86,1492.45 cw(c4396.01,1492.45) R10.1@4327.31,1561.14 ; 4298.86,1492.45 cw(c4396.01,1492.45) R10.1@4327.31,1561.14 ; 4298.86,1524.27 cw(c4336.98,1524.27) R10.1@4327.31,1561.14 ; 4298.86,1524.27 cw(c4336.98,1524.27) R10.1@4327.31,1561.14 ; 4298.86,1524.27 cw(c4336.98,1524.27) R10.1@4327.31,1561.14
  Bottom Layer w12: v1(3290,2555) v1(3530,2555) v1@3785,2555 ; v3(3673,2211) 3701.69,2182.31 C13.1@3726.14,2182.31 ; 3682.73,2201.27 ccw(c3698.64,2217.18) C13.1@3710.84,2198.28 ; 3693.24,2190.76 ccw(c3706.88,2204.41) C13.1@3717.35,2188.19 ; v1@3299.68,2545.32 cw(c3323.04,2521.96) 3323.04,2555 ; v1@3299.68,2545.32 cw(c3323.04,2521.96) 3323.04,2555 ; v1@3299.68,2545.32 cw(c3323.04,2521.96) 3323.04,2555 ; v1@3299.68,2564.68 ccw(c3323.04,2588.04) 3323.04,2555 ; v1@3299.68,2564.68 ccw(c3323.04,2588.04) 3323.04,2555 ; v1@3299.68,2564.68 ccw(c3323.04,2588.04) 3323.04,2555 ; 3496.96,2555 cw(c3496.96,2521.96) v1@3520.32,2545.32 ; 3496.96,2555 ccw(c3496.96,2588.04) v1@3520.32,2564.68 ; 3496.96,2555 ccw(c3496.96,2588.04) v1@3520.32,2564.68 ; 3496.96,2555 cw(c3496.96,2521.96) v1@3520.32,2545.32 ; 3496.96,2555 ccw(c3496.96,2588.04) v1@3520.32,2564.68 ; 3496.96,2555 cw(c3496.96,2521.96) v1@3520.32,2545.32 ; v1@3539.68,2545.32 cw(c3563.04,2521.96) 3563.04,2555 ; v1@3539.68,2545.32 cw(c3563.04,2521.96) 3563.04,2555 ; v1@3539.68,2545.32 cw(c3563.04,2521.96) 3563.04,2555 ; v1@3539.68,2564.68 ccw(c3563.04,2588.04) 3563.04,2555 ; v1@3539.68,2564.68 ccw(c3563.04,2588.04) 3563.04,2555 ; v1@3539.68,2564.68 ccw(c3563.04,2588.04) 3563.04,2555 ; 3744.89,2555 cw(c3744.89,2504.89) v1@3780.32,2540.32 ; 3744.89,2555 cw(c3744.89,2504.89) v1@3780.32,2540.32 ; 3744.89,2555 cw(c3744.89,2504.89) v1@3780.32,2540.32 ; 3769.03,2555 ccw(c3769.03,2570.97) v1@3780.32,2559.68 ; 3769.03,2555 ccw(c3769.03,2570.97) v1@3780.32,2559.68 ; 3769.03,2555 ccw(c3769.03,2570.97) v1@3780.32,2559.68
  Bottom Layer w25: v1@3110,2420 3110,2170 v1(3235,2045) 3240,2040 3630,2040 v1(3695,2105) 3726.14,2136.14 C13.1@3726.14,2182.31 ; v1(3115,2425) 3120,2420 v1(3720,2420) v1@4045.31,2420 ; 3860,2600 3860,2680 4505,2680 4600,2585 v1(4600,2430) ; C10.1@3962.69,2096.14 3971.55,2105 v1(4045,2105) ; 4019.53,1642.79 ccw(c3990.47,1671.86) 4031.57,1671.86 ccw(c4072.68,1671.86) 4043.62,1642.79 ; R17.1@4031.57,1615 v1@4031.57,1926.57 ; v1@4050,2105 v1@4050,2415.31 ; P1.1@4285,1460 P1.1@4290,1455 ; 3110,2395.58 cw(c3144.42,2395.58) v1@3120.08,2419.92 ; 3110,2395.58 cw(c3144.42,2395.58) v1@3120.08,2419.92 ; 3110,2395.58 cw(c3144.42,2395.58) v1@3120.08,2419.92 ; v1@3120.08,2430.08 ccw(c3144.42,2454.42) 3144.42,2420 ; v1@3120.08,2430.08 ccw(c3144.42,2454.42) 3144.42,2420 ; v1@3120.08,2430.08 ccw(c3144.42,2454.42) 3144.42,2420 ; v1@3240.08,2050.08 ccw(c3264.42,2074.42) 3264.42,2040 ; v1@3240.08,2050.08 ccw(c3264.42,2074.42) 3264.42,2040 ; v1@3240.08,2050.08 ccw(c3264.42,2074.42) 3264.42,2040 ; C13.1@3717.3,2173.47 cw(c3695.96,2152.14) 3726.14,2152.14 ; C13.1@3717.3,2173.47 cw(c3695.96,2152.14) 3726.14,2152.14 ; C13.1@3717.3,2173.47 cw(c3695.96,2152.14) 3726.14,2152.14 ; 3726.14,2152.14 cw(c3756.32,2152.14) C13.1@3734.98,2173.47 ; 3726.14,2152.14 cw(c3756.32,2152.14) C13.1@3734.98,2173.47 ; 3726.14,2152.14 cw(c3756.32,2152.14) C13.1@3734.98,2173.47 ; 3774.38,2420 cw(c3774.38,2385.92) C11.1@3798.47,2410.02 ; 3774.38,2420 cw(c3774.38,2385.92) C11.1@3798.47,2410.02 ; 3774.38,2420 cw(c3774.38,2385.92) C11.1@3798.47,2410.02 ; 3779.89,2420 ccw(c3779.89,2446.28) C11.1@3798.47,2427.7 ; 3779.89,2420 ccw(c3779.89,2446.28) C11.1@3798.47,2427.7 ; 3779.89,2420 ccw(c3779.89,2446.28) C11.1@3798.47,2427.7 ; C11.1@3816.15,2410.02 cw(c3840.25,2385.92) 3840.25,2420 ; C11.1@3816.15,2410.02 cw(c3840.25,2385.92) 3840.25,2420 ; C11.1@3816.15,2410.02 cw(c3840.25,2385.92) 3840.25,2420 ; C11.1@3816.15,2427.7 ccw(c3834.73,2446.28) 3834.73,2420 ; C11.1@3816.15,2427.7 ccw(c3834.73,2446.28) 3834.73,2420 ; C11.1@3816.15,2427.7 ccw(c3834.73,2446.28) 3834.73,2420 ; C10.1@3971.53,2092.3 cw(c4002.18,2061.65) 4002.18,2105 ; C10.1@3971.53,2092.3 cw(c4002.18,2061.65) 4002.18,2105 ; C10.1@3971.53,2092.3 cw(c4002.18,2061.65) 4002.18,2105 ; 4016.63,2420 cw(c4016.63,2386.63) v1@4040.23,2410.23 ; 4016.63,2420 cw(c4016.63,2386.63) v1@4040.23,2410.23 ; 4016.63,2420 cw(c4016.63,2386.63) v1@4040.23,2410.23 ; v1@4024.92,1919.92 cw(c4008.85,1903.85) 4031.57,1903.85 ; v1@4024.92,1919.92 cw(c4008.85,1903.85) 4031.57,1903.85 ; v1@4024.92,1919.92 cw(c4008.85,1903.85) 4031.57,1903.85 ; 4031.57,1651.86 cw(c3990.47,1651.86) 4019.53,1622.79 ccw(c3990.47,1651.86) 4031.57,1651.86 ; 4031.57,1651.86 ccw(c4072.68,1651.86) 4043.62,1622.79 cw(c4072.68,1651.86) 4031.57,1651.86 ; C12.1@4035.02,2348.85 cw(c3998.85,2312.68) 4050,2312.68 ; C12.1@4035.02,2348.85 cw(c3998.85,2312.68) 4050,2312.68 ; C12.1@4035.02,2348.85 cw(c3998.85,2312.68) 4050,2312.68 ; C12.1@4035.02,2366.53 ccw(c3998.85,2402.69) v1@4050,2402.69 ; C12.1@4035.02,2366.53 ccw(c3998.85,2402.69) v1@4050,2402.69 ; C12.1@4035.02,2366.53 ccw(c3998.85,2402.69) v1@4050,2402.69 ; v1@4039.92,2110.08 ccw(c4015.58,2134.42) 4050,2134.42 ; v1@4039.92,2110.08 ccw(c4015.58,2134.42) 4050,2134.42 ; v1@4039.92,2110.08 ccw(c4015.58,2134.42) 4050,2134.42 ; v1@4040.23,2410.23 cw(c4016.63,2386.63) 4050,2386.63 ; v1@4040.23,2410.23 cw(c4016.63,2386.63) 4050,2386.63 ; v1@4040.23,2410.23 cw(c4016.63,2386.63) 4050,2386.63
  other v1: 3790,2550
5V: F2.1 P2.1 P3.1 | length 1522
  Top Layer w40: P2.1@2418.34,3328.64 2833.64,3328.64 2915,3410 2985,3410 3023.34,3371.66 P3.1@3023.34,3328.64 ; 2825,3315 2825,3023.23 F2.1@2848.64,3046.87 ; 2825,3152.03 ccw(c2924.27,3152.03) F2.1@2854.08,3081.83 ; 2825,3152.03 ccw(c2924.27,3152.03) F2.1@2854.08,3081.83 ; 2825,3152.03 ccw(c2924.27,3152.03) F2.1@2854.08,3081.83 ; 2986.73,3408.27 cw(c2907.1,3328.64) P3.1@3019.72,3328.64 ; 2986.73,3408.27 cw(c2907.1,3328.64) P3.1@3019.72,3328.64 ; 2986.73,3408.27 cw(c2907.1,3328.64) P3.1@3019.72,3328.64
12V: C5.1 C6.2 D3.2 U10.6 U10.10 | length 1764.1
  Top Layer w20: v1(2785,2045) U10.6@2785,2076.34 ; U10.10@2785,2163.66 v1(2785,2195) ; v1@2778.15,2051.85 ccw(c2761.62,2068.38) 2785,2068.38 ; v1@2778.15,2051.85 ccw(c2761.62,2068.38) 2785,2068.38 ; v1@2778.15,2051.85 ccw(c2761.62,2068.38) 2785,2068.38 ; v1@2778.15,2188.15 cw(c2761.62,2171.62) 2785,2171.62 ; v1@2778.15,2188.15 cw(c2761.62,2171.62) 2785,2171.62 ; v1@2778.15,2188.15 cw(c2761.62,2171.62) 2785,2171.62 ; 2785,2068.38 ccw(c2808.38,2068.38) v1@2791.85,2051.85 ; 2785,2068.38 ccw(c2808.38,2068.38) v1@2791.85,2051.85 ; 2785,2068.38 ccw(c2808.38,2068.38) v1@2791.85,2051.85 ; 2785,2171.62 cw(c2808.38,2171.62) v1@2791.85,2188.15 ; 2785,2171.62 cw(c2808.38,2171.62) v1@2791.85,2188.15 ; 2785,2171.62 cw(c2808.38,2171.62) v1@2791.85,2188.15
  Top Layer w50: v1(2785,2045) 2990,2045 C5.1@3000,2055 ; C6.2@2809.14,1881.69 D3.2@3014.25,1881.69 ; C5.1@3000,2070 C5.1@3000,2055 ; D3.2@3019.48,1876.46 D3.2@3014.25,1881.69 ; 2927.23,1881.69 cw(c2927.23,1819.65) D3.2@2971.1,1863.52 ; 2927.23,1881.69 cw(c2927.23,1819.65) D3.2@2971.1,1863.52 ; 2927.23,1881.69 cw(c2927.23,1819.65) D3.2@2971.1,1863.52 ; 2964.93,2045 ccw(c2964.93,2090.07) C5.1@2996.8,2058.2 ; 2964.93,2045 ccw(c2964.93,2090.07) C5.1@2996.8,2058.2 ; 2964.93,2045 ccw(c2964.93,2090.07) C5.1@2996.8,2058.2 ; D3.2@2971.1,1889.41 ccw(c2901.32,1959.18) C5.1@3000,1959.18 ; D3.2@2971.1,1889.41 ccw(c2901.32,1959.18) C5.1@3000,1959.18 ; D3.2@2971.1,1889.41 ccw(c2901.32,1959.18) C5.1@3000,1959.18 ; C5.1@3000,2055 3000,1895.94 D3.2@3014.25,1881.69
  Bottom Layer w20: v1(2785,2045) v1(2785,2195) ; v1@2778.15,2051.85 ccw(c2761.62,2068.38) 2785,2068.38 ; v1@2778.15,2051.85 ccw(c2761.62,2068.38) 2785,2068.38 ; v1@2778.15,2051.85 ccw(c2761.62,2068.38) 2785,2068.38 ; v1@2778.15,2188.15 cw(c2761.62,2171.62) 2785,2171.62 ; v1@2778.15,2188.15 cw(c2761.62,2171.62) 2785,2171.62 ; v1@2778.15,2188.15 cw(c2761.62,2171.62) 2785,2171.62 ; 2785,2068.38 ccw(c2808.38,2068.38) v1@2791.85,2051.85 ; 2785,2068.38 ccw(c2808.38,2068.38) v1@2791.85,2051.85 ; 2785,2068.38 ccw(c2808.38,2068.38) v1@2791.85,2051.85 ; 2785,2171.62 cw(c2808.38,2171.62) v1@2791.85,2188.15 ; 2785,2171.62 cw(c2808.38,2171.62) v1@2791.85,2188.15 ; 2785,2171.62 cw(c2808.38,2171.62) v1@2791.85,2188.15
ADC_IN0: C15.1 R18.3 U1.16 | length 937.6
  Top Layer w10: 3780,1885.75 3780,1830.75 R18.3@3781.57,1829.17 ; R18.3@3764.23,1831.52 ccw(c3726.16,1869.59) 3780,1869.59 cw(c3726.16,1869.59) R18.3@3764.23,1831.52 ; R18.3@3771.3,1824.45 ccw(c3750.3,1845.44) 3780,1845.44 cw(c3750.3,1845.44) R18.3@3771.3,1824.45 ; 3780,1853.05 ccw(c3820.45,1853.05) 3791.85,1824.45 cw(c3820.45,1853.05) 3780,1853.05 ; 3780,1877.19 ccw(c3844.59,1877.19) 3798.92,1831.52 cw(c3844.59,1877.19) 3780,1877.19
  Top Layer w12: U1.16@3836.65,2130 3836.65,2018.35 3780,1961.71 ; C15.1@3767.08,1912.4 cw(c3746.01,1885.73) 3780,1885.73 ; C15.1@3767.08,1912.4 cw(c3746.01,1885.73) 3780,1885.73 ; C15.1@3767.08,1912.4 cw(c3746.01,1885.73) 3780,1885.73 ; C15.1@3769.56,1943.88 ccw(c3759.56,1961.71) 3780,1961.71 ; C15.1@3769.56,1943.88 ccw(c3759.56,1961.71) 3780,1961.71 ; C15.1@3769.56,1943.88 ccw(c3759.56,1961.71) 3780,1961.71 ; 3780,1885.73 cw(c3818.33,1885.73) C15.1@3791.94,1913.53 ; 3780,1885.73 cw(c3818.33,1885.73) C15.1@3791.94,1913.53 ; 3780,1885.73 cw(c3818.33,1885.73) C15.1@3791.94,1913.53 ; 3780,1885.75 3780,1961.71 ; 3780,1961.71 ccw(c3803.05,1961.71) C15.1@3789.79,1942.85 ; 3780,1961.71 ccw(c3803.05,1961.71) C15.1@3789.79,1942.85 ; 3780,1961.71 ccw(c3803.05,1961.71) C15.1@3789.79,1942.85
ADC_IN1: C14.1 R17.3 U1.17 | length 1112.6
  Top Layer w12: U1.17@3856.33,2100.24 3856.33,2018.67 3860.38,2014.62 ; 3859.6,2015.4 ccw(c3872.94,2028.74) C14.1@3880.29,2011.36 ; 3859.88,2015.12 cw(c3838.62,1993.86) C14.1@3868.69,1993.86 ; C14.1@3880,1995 3860.38,2014.62 ; C14.1@3887.69,1988.86 4067.37,1809.17 R17.3@4131.57,1809.17 ; R17.3@4117.4,1815 R17.3@4131.57,1829.17 ; 3860.38,2014.62 ccw(c3872.58,2026.82) 3879.77,2011.13 cw(c3872.58,2026.82) 3860.38,2014.62 ; 3860.38,2014.62 cw(c3840.33,1994.56) 3868.69,1994.14 ccw(c3840.33,1994.56) 3860.38,2014.62 ; C14.1@3863.66,2011.34 cw(c3850.81,1998.5) 3868.84,1996.23 ccw(c3850.81,1998.5) C14.1@3863.66,2011.34 ; C14.1@3863.66,2011.34 ccw(c3871.47,2019.16) 3877.43,2009.85 cw(c3871.47,2019.16) C14.1@3863.66,2011.34 ; C14.1@3887.69,1964.86 cw(c3887.69,1906.92) 3928.66,1947.89 ; C14.1@3887.69,1964.86 cw(c3887.69,1906.92) 3928.66,1947.89 ; C14.1@3887.69,1964.86 cw(c3887.69,1906.92) 3928.66,1947.89 ; C14.1@3887.69,1976.86 cw(c3887.69,1947.89) C14.1@3908.17,1968.37 ; C14.1@3887.69,1976.86 cw(c3887.69,1947.89) C14.1@3908.17,1968.37 ; C14.1@3887.69,1976.86 cw(c3887.69,1947.89) C14.1@3908.17,1968.37 ; C14.1@3906.69,1983.86 ccw(c3940.49,1983.86) 3916.59,1959.96 ; C14.1@3906.69,1983.86 ccw(c3940.49,1983.86) 3916.59,1959.96 ; C14.1@3906.69,1983.86 ccw(c3940.49,1983.86) 3916.59,1959.96 ; 4074.77,1809.17 cw(c4074.77,1752.37) 4114.94,1792.54 ccw(c4074.77,1752.37) 4074.77,1809.17 ; 4074.77,1809.17 ccw(c4074.77,1865.97) 4114.94,1825.81 cw(c4074.77,1865.97) 4074.77,1809.17
CAN_EN: U1.46 U9.8 | length 1638.4
  Top Layer w10: v3(3585,2460) 3625,2460 3635,2470 3810,2470 3816.96,2463.04 U1.46@3816.96,2390 ; v3@3588.42,2456.58 cw(c3596.69,2448.31) 3596.69,2460 ; v3@3588.42,2456.58 cw(c3596.69,2448.31) 3596.69,2460 ; v3@3588.42,2456.58 cw(c3596.69,2448.31) 3596.69,2460 ; v3@3588.42,2463.42 ccw(c3596.69,2471.69) 3596.69,2460 ; v3@3588.42,2463.42 ccw(c3596.69,2471.69) 3596.69,2460 ; v3@3588.42,2463.42 ccw(c3596.69,2471.69) 3596.69,2460
  Bottom Layer w10: v3@2935,3105 2880,3050 2880,2821.33 3231.33,2470 3535,2470 3545,2460 v3(3585,2460) ; 2931.73,3101.73 cw(c2940,3093.47) v3@2940,3105.16 ; 2931.73,3101.73 ccw(c2923.47,3110) v3@2935.16,3110 ; 2931.73,3101.73 ccw(c2923.47,3110) v3@2935.16,3110 ; 2931.73,3101.73 cw(c2940,3093.47) v3@2940,3105.16 ; 2931.73,3101.73 ccw(c2923.47,3110) v3@2935.16,3110 ; 2931.73,3101.73 cw(c2940,3093.47) v3@2940,3105.16 ; 3573.31,2460 cw(c3573.31,2448.31) v3@3581.58,2456.58 ; 3573.31,2460 ccw(c3573.31,2471.69) v3@3581.58,2463.42 ; 3573.31,2460 ccw(c3573.31,2471.69) v3@3581.58,2463.42 ; 3573.31,2460 cw(c3573.31,2448.31) v3@3581.58,2456.58 ; 3573.31,2460 ccw(c3573.31,2471.69) v3@3581.58,2463.42 ; 3573.31,2460 cw(c3573.31,2448.31) v3@3581.58,2456.58
  other v3: 2940,3110
CAN_H: P2.4 P3.4 U9.7 | length 1552.2
  Top Layer w12: P3.4@2983.97,3245.96 2990,3239.93 U9.7@2990,3089.49 ; P3.4@2971.51,3233.5 cw(c2926.86,3188.86) 2990,3188.86 ; P3.4@2971.51,3233.5 cw(c2926.86,3188.86) 2990,3188.86 ; P3.4@2971.51,3233.5 cw(c2926.86,3188.86) 2990,3188.86 ; P3.4@2979.99,3241.99 cw(c2955.83,3217.83) 2990,3217.83 ; P3.4@2979.99,3241.99 cw(c2955.83,3217.83) 2990,3217.83 ; P3.4@2979.99,3241.99 cw(c2955.83,3217.83) 2990,3217.83 ; U9.7@2985.89,3125.09 ccw(c2975.97,3135.01) 2990,3135.01 ; U9.7@2985.89,3125.09 ccw(c2975.97,3135.01) 2990,3135.01 ; U9.7@2985.89,3125.09 ccw(c2975.97,3135.01) 2990,3135.01 ; 2990,3135.01 ccw(c3004.03,3135.01) U9.7@2994.11,3125.09 ; 2990,3135.01 ccw(c3004.03,3135.01) U9.7@2994.11,3125.09 ; 2990,3135.01 ccw(c3004.03,3135.01) U9.7@2994.11,3125.09 ; 2990,3217.98 cw(c3011.95,3217.98) P3.4@2996.43,3233.5 ; 2990,3217.98 cw(c3011.95,3217.98) P3.4@2996.43,3233.5 ; 2990,3217.98 cw(c3011.95,3217.98) P3.4@2996.43,3233.5
  Bottom Layer w12: P2.4@2378.97,3240.96 2424.93,3195 2933.01,3195 P3.4@2983.97,3245.96 ; P2.4@2378.97,3228.34 cw(c2378.97,3197.87) 2400.52,3219.41 ; P2.4@2378.97,3228.34 cw(c2378.97,3197.87) 2400.52,3219.41 ; P2.4@2378.97,3228.34 cw(c2378.97,3197.87) 2400.52,3219.41 ; P2.4@2396.59,3245.96 ccw(c2451.2,3245.96) 2412.59,3207.34 ; P2.4@2396.59,3245.96 ccw(c2451.2,3245.96) 2412.59,3207.34 ; P2.4@2396.59,3245.96 ccw(c2451.2,3245.96) 2412.59,3207.34 ; 2953.89,3215.88 cw(c2983.97,3185.8) P3.4@2983.97,3228.34 ; 2953.89,3215.88 ccw(c2923.8,3245.96) P3.4@2966.35,3245.96 ; 2953.89,3215.88 ccw(c2923.8,3245.96) P3.4@2966.35,3245.96 ; 2953.89,3215.88 cw(c2983.97,3185.8) P3.4@2983.97,3228.34 ; 2953.89,3215.88 ccw(c2923.8,3245.96) P3.4@2966.35,3245.96 ; 2953.89,3215.88 cw(c2983.97,3185.8) P3.4@2983.97,3228.34
CAN_L: P2.3 P3.3 U9.6 | length 1395.5
  Top Layer w12: P2.3@2457.71,3245.96 2457.71,3237.29 v3(2535,3160) ; U9.6@3040,3089.49 3040,3223.25 P3.3@3062.71,3245.96 ; P2.3@2457.71,3228.34 cw(c2457.71,3206.72) 2472.99,3222.01 ; P2.3@2457.71,3228.34 cw(c2457.71,3206.72) 2472.99,3222.01 ; P2.3@2457.71,3228.34 cw(c2457.71,3206.72) 2472.99,3222.01 ; P2.3@2463.33,3245.96 ccw(c2497.83,3245.96) 2473.44,3221.56 ; P2.3@2463.33,3245.96 ccw(c2497.83,3245.96) 2473.44,3221.56 ; P2.3@2463.33,3245.96 ccw(c2497.83,3245.96) 2473.44,3221.56 ; P2.3@2475.33,3245.96 ccw(c2538.8,3245.96) 2493.92,3201.08 ; P2.3@2475.33,3245.96 ccw(c2538.8,3245.96) 2493.92,3201.08 ; P2.3@2475.33,3245.96 ccw(c2538.8,3245.96) 2493.92,3201.08 ; U9.6@3035.89,3125.09 ccw(c3025.97,3135.01) 3040,3135.01 ; U9.6@3035.89,3125.09 ccw(c3025.97,3135.01) 3040,3135.01 ; U9.6@3035.89,3125.09 ccw(c3025.97,3135.01) 3040,3135.01 ; 3040,3135.01 ccw(c3054.03,3135.01) U9.6@3044.11,3125.09 ; 3040,3135.01 ccw(c3054.03,3135.01) U9.6@3044.11,3125.09 ; 3040,3135.01 ccw(c3054.03,3135.01) U9.6@3044.11,3125.09
  Bottom Layer w12: v3(2535,3160) 2976.75,3160 P3.3@3062.71,3245.96 ; 3032.63,3215.88 cw(c3062.71,3185.8) P3.3@3062.71,3228.34 ; 3032.63,3215.88 ccw(c3002.54,3245.96) P3.3@3045.09,3245.96 ; 3032.63,3215.88 ccw(c3002.54,3245.96) P3.3@3045.09,3245.96 ; 3032.63,3215.88 cw(c3062.71,3185.8) P3.3@3062.71,3228.34 ; 3032.63,3215.88 ccw(c3002.54,3245.96) P3.3@3045.09,3245.96 ; 3032.63,3215.88 cw(c3062.71,3185.8) P3.3@3062.71,3228.34
CAN_RX: U1.32 U9.4 | length 1902.1
  Top Layer w10: U1.32@4019.01,2290.99 4105.04,2290.99 4152,2337.96 4152,2412 v2(4190,2450) ; U1.32@4075.47,2288.57 cw(c4081.32,2282.73) 4081.32,2290.99 ; U1.32@4075.47,2288.57 cw(c4081.32,2282.73) 4081.32,2290.99 ; U1.32@4075.47,2288.57 cw(c4081.32,2282.73) 4081.32,2290.99 ; 4178.37,2438.37 cw(c4190,2426.75) v2@4190,2443.19 ; 4178.37,2438.37 ccw(c4166.75,2450) v2@4183.19,2450 ; 4178.37,2438.37 ccw(c4166.75,2450) v2@4183.19,2450 ; 4178.37,2438.37 cw(c4190,2426.75) v2@4190,2443.19 ; 4178.37,2438.37 ccw(c4166.75,2450) v2@4183.19,2450 ; 4178.37,2438.37 cw(c4190,2426.75) v2@4190,2443.19
  Bottom Layer w10: v2(3090,2865) 3090,2685 3264.19,2510.81 4134.19,2510.81 4190,2455 v2(4190,2450) ; v2@3085.18,2860.18 cw(c3073.56,2848.56) 3090,2848.56 ; v2@3085.18,2860.18 cw(c3073.56,2848.56) 3090,2848.56 ; v2@3085.18,2860.18 cw(c3073.56,2848.56) 3090,2848.56 ; 3090,2848.56 cw(c3106.44,2848.56) v2@3094.82,2860.18 ; 3090,2848.56 cw(c3106.44,2848.56) v2@3094.82,2860.18 ; 3090,2848.56 cw(c3106.44,2848.56) v2@3094.82,2860.18 ; 4174.84,2470.16 cw(c4154.67,2450) v2@4183.19,2450 ; 4174.84,2470.16 cw(c4154.67,2450) v2@4183.19,2450 ; 4174.84,2470.16 cw(c4154.67,2450) v2@4183.19,2450
CAN_TX: U1.33 U9.1 | length 1809.4
  Top Layer w10: U1.33@4015,2308.9 4098.9,2308.9 4135,2345 4135,2440 v2(4145,2450)
  Bottom Layer w10: v2(2940,2860) 2940,2795 3241.19,2493.81 4091.19,2493.81 4138.91,2454.96 v2(4145,2450) ; v2@2935.18,2855.18 cw(c2923.56,2843.56) 2940,2843.56 ; v2@2935.18,2855.18 cw(c2923.56,2843.56) 2940,2843.56 ; v2@2935.18,2855.18 cw(c2923.56,2843.56) 2940,2843.56 ; 2940,2843.56 cw(c2956.44,2843.56) v2@2944.82,2855.18 ; 2940,2843.56 cw(c2956.44,2843.56) v2@2944.82,2855.18 ; 2940,2843.56 cw(c2956.44,2843.56) v2@2944.82,2855.18 ; 4132.25,2460.38 cw(c4121.87,2447.63) v2@4138.22,2449.31 ; 4132.25,2460.38 ccw(c4142.63,2473.13) v2@4144.31,2456.78 ; 4132.25,2460.38 ccw(c4142.63,2473.13) v2@4144.31,2456.78 ; 4132.25,2460.38 cw(c4121.87,2447.63) v2@4138.22,2449.31 ; 4132.25,2460.38 ccw(c4142.63,2473.13) v2@4144.31,2456.78 ; 4132.25,2460.38 cw(c4121.87,2447.63) v2@4138.22,2449.31